# Altium PCB bluienrg.PcbDoc
Units mm, origin at the board's own origin, x right, y up, seen from the top; angles counter-clockwise.
Board outline 21.99 x 29.99 mm, 2 copper layers (Top Layer, Bottom Layer), stack 0.871 mm thick; 61 components, 38 nets, 192 pads, 30 vias.
Unrouted connection lines stored in the file: 96.
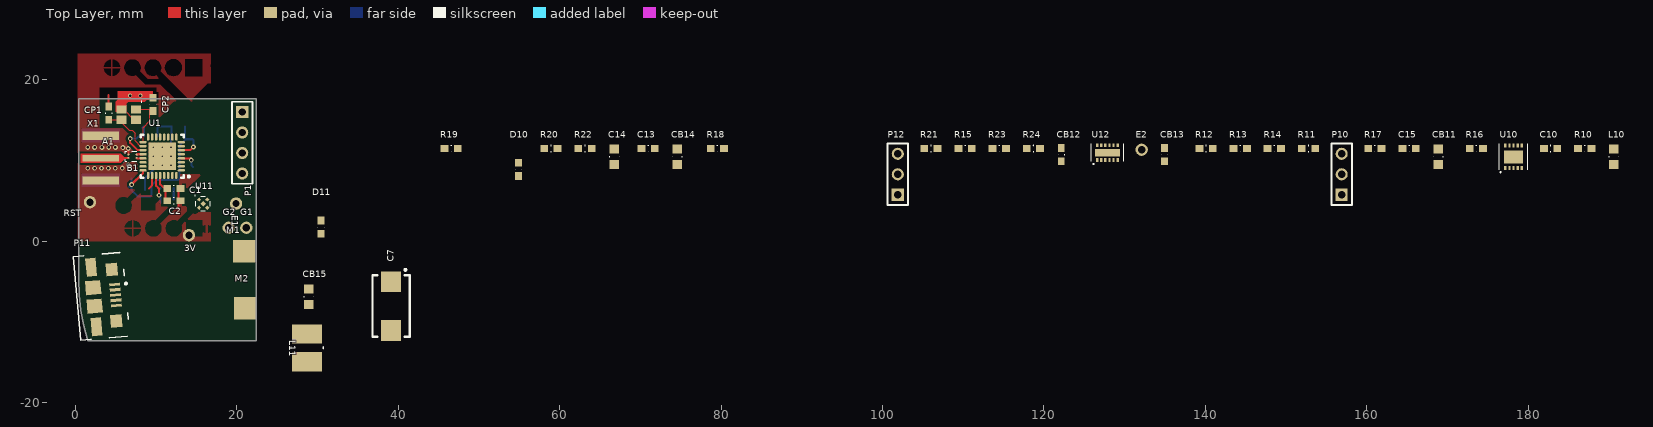
[diagram p0: Top Layer view]
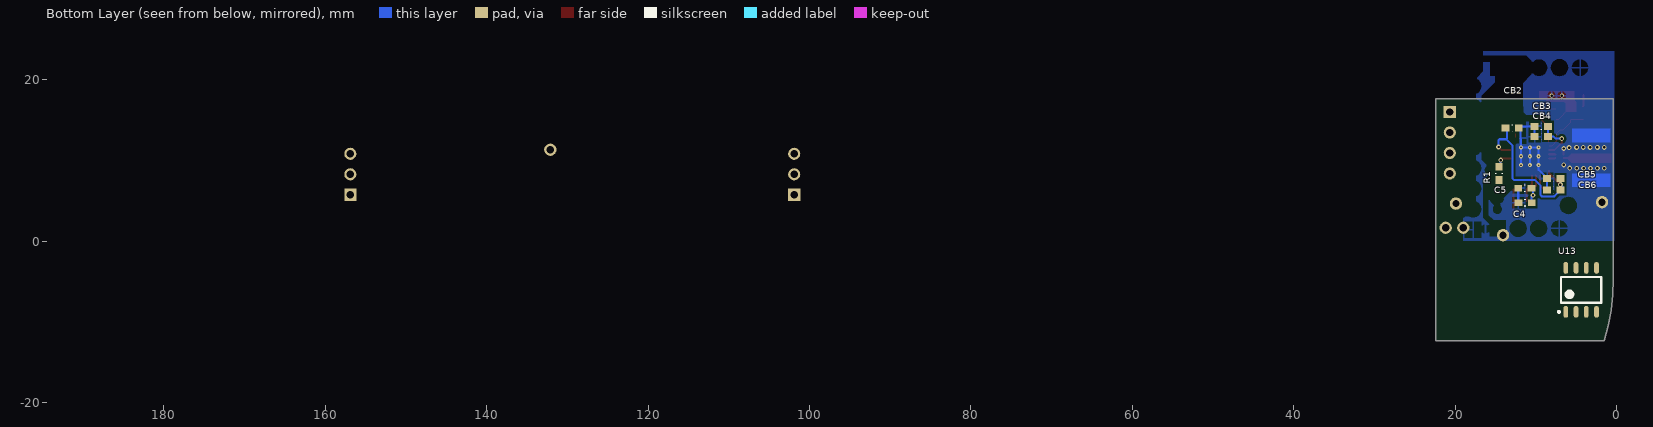
[diagram p1: Bottom Layer view, seen from below]

## Layer stack, top to bottom
Top Solder: solder mask 0.0102, Solder Resist, Dk 3.5
Top Layer: signal copper 0.0356
Dielectric 1: core 0.8, FR-4, Dk 4.31
Bottom Layer: signal copper 0.0356
Bottom Solder: solder mask 0.0102, Solder Resist, Dk 3.5

## Board outline
0.385,17.667 0.385,-4.744 0.456,-6.664 0.668,-8.573 1.021,-10.461 1.513,-12.319 22.37,-12.319 22.37,17.667

## Design rules (kind name [scope] priority, off if disabled: settings)
Clearance Clearance_5 [HasFootprint('BALF-NRG') vs InPolygonClass('All Polygons')] p1: gap=0.5 ignorepadtopadclearanceinfootprint=FALSE
Clearance Clearance_6 [InNet('NetA1_ANT') vs InPolygonClass('All Polygons')] p2: gap=0.3 ignorepadtopadclearanceinfootprint=FALSE
Clearance Clearance_7 [InNetClass('HC') vs InPolygonClass('All Polygons')] p3: gap=0.5 ignorepadtopadclearanceinfootprint=FALSE
Clearance Clearance_9 [All vs InPolygonClass('All Polygons')] p4: gap=0.3 ignorepadtopadclearanceinfootprint=FALSE
Clearance Clearance_1 [InNet('NetA1_ANT')] p5: gap=0.1 ignorepadtopadclearanceinfootprint=FALSE
Clearance [InNetClass('RFB')] p6: gap=0.1 ignorepadtopadclearanceinfootprint=FALSE
Clearance Clearance_4 [HasFootprint('BALF-NRG')] p7: gap=0.2 ignorepadtopadclearanceinfootprint=FALSE
Clearance Clearance_3 [HasFootprint('MSOP-8')] p8: gap=0.2 ignorepadtopadclearanceinfootprint=FALSE
Clearance Clearance_2 [HasFootprint('BLUENRG-1')] p9: gap=0.15 ignorepadtopadclearanceinfootprint=FALSE
Clearance Clearance_8 [All] p10: gap=0.2 ignorepadtopadclearanceinfootprint=FALSE
MaxMinImpedance [InNetClass('AN')] p1: minimum=45.00 maximum=55.00
MinimumSolderMaskSliver MinimumSolderMaskSliver_2 [HasFootprint('BALF-NRG')] p1: minsoldermaskwidth=0.02
MinimumSolderMaskSliver [HasFootprint('16MHZ_25_20')] p2: minsoldermaskwidth=0.12
MinimumSolderMaskSliver MinimumSolderMaskSliver_1 [All] p3: minsoldermaskwidth=0.2
PolygonConnect PolygonConnect_1 [HasFootprint('BlueNRG-1')] p1: connectstyle=Direct reliefconductorwidth=0.254 reliefentries=4 polygonreliefangle="90 Angle" airgapwidth=0.254
PolygonConnect PolygonConnect_4 [HasFootprint('sma')] p2: connectstyle=Direct reliefconductorwidth=0.254 reliefentries=4 polygonreliefangle="90 Angle" airgapwidth=0.254
PolygonConnect PolygonConnect_3 [IsShieldingVia] p3: connectstyle=Direct reliefconductorwidth=0.254 reliefentries=4 polygonreliefangle="90 Angle" airgapwidth=0.254
PolygonConnect PolygonConnect_2 [IsStitchingVia] p4: connectstyle=Direct reliefconductorwidth=0.254 reliefentries=4 polygonreliefangle="90 Angle" airgapwidth=0.254
PolygonConnect [All] p5: connectstyle=Relief reliefconductorwidth=0.254 reliefentries=4 polygonreliefangle="90 Angle" airgapwidth=0.254
RoutingCorners [InNetClass('AN')] p1: cornerstyle=Round minsetback=2.54 maxsetback=2.54
RoutingCorners RoutingCorners_1 [All] p2: cornerstyle=45-Degree minsetback=2.54 maxsetback=2.54
RoutingVias [All] p1: holewidth=0.3 width=0.6 viastyle="Through Hole" minholewidth=0.3 minwidth=0.6 maxholewidth=0.3 maxwidth=0.6
SMDNeckDown [InNet('NetA1_ANT')] p1: percent=600.000
SignalStimulus [All] p1: kind=1 level=0 starttime=10.00n stoptime=60.00n periodtime=100.00n
SilkToSolderMaskClearance SilkToSolderMaskClearance_1 [HasFootprint('MY_0603')] p1: minsilkscreentomaskgap=0.1 clearancetoexposedcopper=TRUE
SilkToSolderMaskClearance SilkToSolderMaskClearance_2 [HasFootprint('MY_0805')] p2: minsilkscreentomaskgap=0.1 clearancetoexposedcopper=TRUE
SilkToSolderMaskClearance [IsPad] p3: minsilkscreentomaskgap=0.254 clearancetoexposedcopper=TRUE
SolderMaskExpansion [All] p1: expansion=0.102
SupplyNets SupplyNets_1 [InNet('VCC')] p1: voltage=3.000
SupplyNets [InNet('12V')] p2: voltage=12.00
Width [InNet('NetA1_ANT')] p1: maxlimit=1.706 minlimit=-0.044 preferedwidth=1.243 toplayer_minwidth=0.037 bottomlayer_maxwidth=-0.042 bottomlayer_prefwidth=-0.043 impedancedriven=TRUE minimp=40.000000 maximp=140.000000 favimp=50.000000
Width Width_2 [InNetClass('HC')] p2: maxlimit=0.8 minlimit=0.15 preferedwidth=0.8
Width Width_1 [All] p3: maxlimit=0.8 minlimit=0.15 preferedwidth=0.254
27 further rules are at their usual default settings.

## Classes and differential pairs
net class RFB: NetB1_RF0 NetB1_RF1
net class AN: NetA1_ANT
net class HC: 5V NetM1_1 NetM2_1

## Components (designator, comment, footprint, x,y, rotation, side; value= is the part's Value field where it differs from the comment)
3V "ENC" MY_PAD 14.046,0.737 r0 top
A1 "ANTENNA" sma 3.124,10.281 r270 top
B1 "BALF-NRG" BALF-NRG 7.555,10.719 r180 top
C1 "100p C0G" MY_0603 12.175,6.5 r180 top value=100pF
C2 "100n" MY_0603 12.175,5 r180 top value=100pF
C4 "100n" MY_0603 11.325,4.75 r180 bottom value=100pF
C5 "1u" MY_0603 11.34,6.553 r180 bottom value=100pF
C7 "100uF" 100uf_tant 39.091,-8.052 r270 top
C10 "100n" MY_0603 182.79,11.455 r0 top value=100pF
C13 "1u" MY_0603 70.954,11.455 r0 top value=100pF
C14 "10u" MY_0805 66.763,10.465 r90 top value=100pF
C15 "100nF" MY_0603 165.264,11.455 r0 top value=100pF
CB2 "100n" MY_0603 12.916,13.995 r0 bottom value=100pF
CB3 "1u" MY_0603 9.308,14.224 r180 bottom value=100pF
CB4 "100n" MY_0603 9.308,12.954 r180 bottom value=100pF
CB5 "1u" MY_0603 7.759,7.772 r180 bottom value=100pF
CB6 "100n" MY_0603 7.759,6.325 r180 bottom value=100pF
CB11 "10u" MY_0805 168.871,10.465 r90 top value=100pF
CB12 "100n" MY_0603 122.16,10.719 r90 top value=100pF
CB13 "100n" MY_0603 134.962,10.719 r90 top value=100pF
CB14 "10uF" MY_0805 74.561,10.465 r90 top value=100pF
CB15 "10uF" MY_0805 28.905,-6.883 r90 top value=100pF
CP1 "13pF C0G" MY_0603 4.115,15.865 r270 top value=100pF
CP2 "13pF C0G" MY_0603 9.601,16.954 r270 top value=100pF
D10 "LED2" MY_0603 54.901,8.89 r90 top
D11 "LED2" MY_0603 30.429,1.727 r90 top
E1 "ENC" MY_PAD 19.888,4.648 r0 top
E2 "ENC" MY_PAD 132.117,11.328 r0 top
G1 "ENC" MY_PAD 21.158,1.651 r0 top
G2 "ENC" MY_PAD 18.974,1.651 r0 top
L10 "Inductor" MY_0805 190.639,10.465 r90 top value=10nH
L11 "Inductor" IND_4_4 28.677,-13.233 r270 top value=2.2uH
M1 "M1" MPAD 20.904,-1.27 r0 top
M2 "M2" MPAD 21.057,-8.306 r0 top
P1 "DBG" HDR1X4 20.65,16.002 r270 top
P10 "SWD" HDR1X3 156.907,5.74 r90 top
P11 "USBmicroAB" 1981584 0.864,-7.036 r185 top
P12 "BAT" HDR1X3 101.891,5.74 r90 top
R1 "4.7k" MY_0603 14.54,8.382 r90 bottom value=4.7K
R10 "4.7k" MY_0603 187.032,11.455 r0 top value=4.7K
R11 "100k" MY_0603 152.793,11.455 r0 top value=4.7K
R12 "100k" MY_0603 140.093,11.455 r0 top value=4.7K
R13 "0R" MY_0603 144.334,11.455 r0 top value=4.7K
R14 "0R" MY_0603 148.551,11.455 r0 top value=4.7K
R15 "0R" MY_0603 110.248,11.455 r0 top value=4.7K
R16 "100R" MY_0603 173.595,11.455 r0 top value=4.7K
R17 "4.7k" MY_0603 161.022,11.455 r0 top value=4.7K
R18 "4.7k" MY_0603 79.539,11.455 r0 top value=4.7K
R19 "4.7k" MY_0603 46.544,11.455 r0 top value=4.7K
R20 "2.2k" MY_0603 58.914,11.455 r0 top value=4.7K
R21 "4.7k" MY_0603 106.006,11.455 r0 top value=4.7K
R22 "56k" MY_0603 63.131,11.455 r0 top value=4.7K
R23 "51k" MY_0603 114.464,11.455 r0 top value=4.7K
R24 "51k" MY_0603 118.706,11.455 r0 top value=4.7K
RST "M1" MY_PAD 1.778,4.826 r0 top
U1 "BlueNRG-1" BlueNRG-1 10.73,10.516 r180 top
U10 "MAX8815A" PDQN10 177.202,9.042 r0 top
U11 "RT9078" RT9078 15.799,4.648 r0 top
U12 "DRV8839DSSR" DRV8839 126.631,10.058 r0 top
U13 "TP4056" MY_SOIC8N 4.369,-6.045 r90 bottom
X1 "16MHZ" 16MHZ_25_20 6.578,15.687 r180 top

## Footprints (in the part's own frame and the unit in brackets; to place one, negate y for a bottom-side part, rotate by r counter-clockwise, add the part's x,y. Pads: shape width x height; smd on the part's side, far side on the other; paste and mask are expansions set on the pad)
16MHZ_25_20 [mm] "DFN, 4-Leads, Body 2.00x2.50mm, Pitch 1.70mm, IPC Medium Density"
  rect 1.2x1 smd mask+0.08: G1(0.9,-0.65) G2(-0.9,0.65) XT1(-0.9,-0.65) XT2(0.9,0.65)
  silkscreen extent -1.65,-1.65 -1.55,-1.55, body extent -1.3,-1.05 1.3,1.05, height 0.5
100uf_tant [mm]
  rect 2.55x2.45 smd: +(-3.025,0) -(3.025,0)
  silkscreen extent -4.62,-2.3 3.8,2.3, body extent -3.8,-2.3 3.8,2.3, height 2.8
1981584 [mm] "Connector; USB2.0, Type B, SM; 5 Position; Right Angle"
  rect 1.35x0.4 smd: 1(-4.1,-1.3) 2(-4.1,-0.65) 3(-4.1,0) 4(-4.1,0.65) 5(-4.1,1.3)
  rect 1.4x1.6 smd: 6(-3.9,3.2) 8(-3.9,-3.2)
  rect 1.3x2.3 smd: 7(-1.4,3.7) 9(-1.4,-3.7)
  rect 1.9x1.8 smd: 10(-1.4,1.15) 11(-1.4,-1.15)
  silkscreen extent -5.62,-5.2 0.7,5.2, body extent -5.2,-5 0.6,4.95, height 3.9
BALF-NRG [mm]
  round 0.22 smd paste+0.1 mask+0.1: AN(1,0.4) G(1,0) RF0(0,0.4) RF1(0,0)
  silkscreen extent 0,-0.4 1.61,1
BlueNRG-1 [mm] "QFN, 32-Leads, Body 5.00x5.00mm, Pitch 0.50mm, Thermal Pad 3.45x3.45mm, IPC Medium Density"
  oval 0.9x0.3 smd: 1(-2.375,1.75) 2(-2.375,1.25) 3(-2.375,0.75) 4(-2.375,0.25) 5(-2.375,-0.25) 6(-2.375,-0.75) 7(-2.375,-1.25) 8(-2.375,-1.75) 17(2.375,-1.75) 18(2.375,-1.25) 19(2.375,-0.75) 20(2.375,-0.25) 21(2.375,0.25) 22(2.375,0.75) 23(2.375,1.25) 24(2.375,1.75)
  oval 0.3x0.9 smd: 9(-1.75,-2.375) 10(-1.25,-2.375) 11(-0.75,-2.375) 12(-0.25,-2.375) 13(0.25,-2.375) 14(0.75,-2.375) 15(1.25,-2.375) 16(1.75,-2.375) 25(1.75,2.375) 26(1.25,2.375) 27(0.75,2.375) 28(0.25,2.375) 29(-0.25,2.375) 30(-0.75,2.375) 31(-1.25,2.375) 32(-1.75,2.375)
  rect 3.45x3.45 smd: 33(0,0)
  silkscreen extent -3.42,-2.65 2.65,2.65, body extent -2.5,-2.5 2.5,2.5, height 0.8
DRV8839 [mm]
  rect 0.3x0.45 smd: EN1(1.5,1.8) EN2(2.5,1.8) G1(2,0) G2(2.5,0) IN1(1,1.8) IN2(2,1.8) nSLEEP(0.5,1.8) OUT1(1,0) OUT2(1.5,0) VCC(0,1.8) VM1(0,0) VM2(0.5,0)
  rect 3.1x0.95 smd: PG(1.25,0.9)
  silkscreen extent -0.75,-0.51 3.25,2
HDR1X3 [mm] "Connector; Header; 3 Position"
  rect 1.5x1.5 hole 0.9: 1(0,0)
  round 1.5 hole 0.9: 2(2.54,0) 3(5.08,0)
  silkscreen extent -1.27,-1.27 6.35,1.27
HDR1X4 [mm] "Connector; Header; 4 Position"
  rect 1.5x1.5 hole 0.9: 1(0,0)
  round 1.5 hole 0.9: 2(2.54,0) 3(5.08,0) 4(7.62,0)
  silkscreen extent -1.27,-1.27 8.89,1.27
IND_4_4 [mm]
  rect 2.4x3.7 smd: 1(-1.725,0) 2(1.725,0)
  silkscreen extent -0.13,-2 0.12,2, body extent -2.27,-2 2.27,2, height 2.5
MPAD [mm]
  rect 2.8x2.8 smd: 1(0,0)
MY_0603 [mm] "0603 without silkscreen issues"
  rect 0.965x0.85 smd: 1(-0.825,0) 2(0.825,0)
  silkscreen extent -0.01,-0.41 0.01,0.41, body extent -0.8,-0.4 0.8,0.4, height 3
MY_0805 [mm] "0805 without silkscreen issues"
  rect 1.14x1.2 smd: 1(-0.955,0) 2(0.955,0)
  silkscreen extent -0.01,-0.61 0.01,0.61, body extent -1,-0.6 1,0.6, height 4
MY_PAD [mil]
  round 60 hole 35.43: 1(0,0)
MY_SOIC8N [mm]
  oval 1.45x0.6 smd: 1(-2.725,1.905) 2(-2.725,0.635) 3(-2.725,-0.635) 4(-2.725,-1.905) 5(2.725,-1.905) 6(2.725,-0.635) 7(2.725,0.635) 8(2.725,1.905)
  silkscreen extent -2.85,-2.5 1.6,2.88, body extent -2,-2.5 2,2.5, height 2.65
PDQN10 [mm]
  rect 0.3x0.5 smd: 1(0,0) 2(0.5,0) 3(1,0) 4(1.5,0) 5(2,0) 6(2,2.8) 7(1.5,2.8) 8(1,2.8) 9(0.5,2.8) 10(0,2.8)
  rect 2.4x1.6 smd: 11(1,1.4)
  silkscreen extent -0.77,-0.51 2.77,3
RT9078 [mm] "DFN, 4-Leads, Body 1.00x1.00mm, Pitch 0.63mm, IPC Medium Density"
  rect 0.4x0.4 smd rot 45: EN(0.5,-0.5) GND(-0.5,-0.5) VIN(0.5,0.5) VOUT(-0.5,0.5)
  rect 0.5x0.5 smd rot 45: SGND(0,0)
  silkscreen extent -1.05,-0.9 0.9,1.05, body extent -0.5,-0.5 0.5,0.5, height 0.45
sma [mm]
  rect 0.82x4.56 smd: ANT(0,0)
  rect 1x4.56 smd: G1(-2.775,0) G2(2.775,0)
  Bottom Layer region: -3.65,-2.4 -1.95,-2.4 -1.95,2.4 -3.65,2.4
  Bottom Layer region: 1.9,-2.4 3.6,-2.4 3.6,2.4 1.9,2.4

## Part data
3V E1 E2 G1 G2 M1 M2 RST: library part Socket, "Socket", LatestRevisionDate=17-Jul-2002, LatestRevisionNote="Re-released for DXP Platform.", Publisher="Altium Limited"
C1 C2 C4 C5 C10 C13 C14 C15 CB2 CB3 CB4 CB5 CB6 CB11 CB12 CB13 CB14 CB15 CP1 CP2: library part "Cap Semi", "Capacitor (Semiconductor SIM Model)", LatestRevisionDate=29-May-2009, LatestRevisionNote="IPC-7351 Footprint Added.", PackageDescription="Chip Capacitor", PackageReference=C1206, Published=8-Jun-2000, Publisher="Altium Limited"
C7: library part C_TANT
D10 D11: "Typical RED, GREEN, YELLOW, AMBER GaAs LED", LatestRevisionDate=17-Jul-2002, LatestRevisionNote="Re-released for DXP Platform.", PackageDescription="SM LED; 2 Flat Leads", PackageReference=3.2X1.6X1.1, PackageVersion=Feb-2002, Published=8-Jun-2000, Publisher="Altium Limited"
P1: library part "Header 4", "Header, 4-Pin", LatestRevisionDate=17-Jul-2002, LatestRevisionNote="Re-released for DXP Platform.", Publisher="Altium Limited"
P10 P12: library part "Header 3", "Header, 3-Pin", LatestRevisionDate=17-Jul-2002, LatestRevisionNote="Re-released for DXP Platform.", Publisher="Altium Limited"
R1 R10 R11 R12 R13 R14 R15 R16 R17 R18 R19 R20 R21 R22 R23 R24: library part Res3, "Resistor", LatestRevisionDate=29-May-2009, LatestRevisionNote="IPC-7351 Footprint Added.", PackageDescription="Chip Resistor", PackageReference=J1-0603, Published=8-Jun-2000, Publisher="Altium Limited"
X1: library part XTAL_4PIN
L10 L11: Code_IEC=1005, Code_JEITA=0402, LatestRevisionDate=29-May-2009, LatestRevisionNote="IPC-7351 Footprint Added.", PackageDescription="Chip Inductor", PackageReference=0402-A, Published=8-Jun-2000, Publisher="Altium Limited"

## Via types
v1: diameter 0.6, hole 0.3, Top Layer to Bottom Layer, tented both sides, 19 vias
v2: diameter 0.5, hole 0.2, Top Layer to Bottom Layer, 9 vias
v3: diameter 0.5, hole 0.3, Top Layer to Bottom Layer, tented both sides, 2 vias

## Nets (pads, with @x,y where several pads share a name; then routed paths per layer and width w, separated by ;. In a path a pad name is that pad's centre, name@x,y a point inside that pad or via, vN(x,y) a via of type N, cw(c..) or ccw(c..) an arc to the next point about the centre after c; other vN are vias at no path point)
5V: C7.+ CB11.2 CB12.2 R16.1 U10.6 U10.9 U10.10
BL_ENTER: P1.1 R1.2 U1.4 | length 2.3
  Top Layer w0.254: U1.4 13.109,10.262 14.261,10.262 14.337,10.185 v1(14.337,10.033)
  Bottom Layer w0.254: v1(14.337,10.033) 14.337,9.41 R1.2
BL_RXD: P1.3 U1.32
BL_TXD: P1.2 U1.3
CHR: R23.2 R24.1 U1.16
E1: E1.1 R11.1 U1.30
E2: E2.1 R12.1 U1.29
EN: R17.2 U1.5 U10.4
GND: A1.G1 A1.G2 B1.G C1.1 C2.1 C4.1 C5.1 C7.- C10.1 C13.1 C14.1 C15.1 CB2.1 CB3.1 CB4.1 CB5.1 CB6.1 CB11.1 CB12.1 CB13.2 CB14.1 CB15.1 CP1.1 CP2.1 G1.1 G2.1 P1.4 P10.3 P11.5 P11.6 P11.7 P11.8 P11.9 P11.10 P11.11 P12.3 R1.1 R14.1 R17.1 R20.2 R22.2 R24.2 U1.33 U10.5 U10.11 U11.GND U11.SGND U13.3 X1.G1 X1.G2 | length 26.6
  Top Layer w0.15: X1.G1 5.944,16.337 6.574,15.706 ; 6.607,15.643 7.213,15.037 X1.G2
  Top Layer w0.254: 4.052,18.1 4.052,16.753 CP1.1 ; 5.728,18.073 5.791,18.01 ; B1.G 6.555,11.204 v1@6.579,11.227 ; 12.737,3.556 12.775,3.594 C1.1@12.775,6.401
  Bottom Layer w0.254: CB6.1 CB5.1 9.63,8.819 v2(9.63,9.416) v2(9.63,10.516) v2(9.63,11.616) v2(10.73,11.616) ; CB4.1 CB3.1 11.861,14.224 11.887,14.199 11.887,12.725 11.83,12.669 v2(11.83,11.616) ; v2(10.73,9.416) v2(10.73,10.516) v2(10.73,11.616) ; v2(11.83,9.416) v2(11.83,10.516) v2(11.83,11.616) ; C5.1 12.165,5.182 C4.1@12.19,5.156 ; v2(10.73,11.616) v2(11.83,11.616)
  other v1: 1.506,9.026 2.36,9.026 3.214,9.026 4.068,9.026 4.922,9.026 5.791,9.042 6.528,9.449 6.528,11.481 5.867,11.582 1.499,11.608 2.362,11.608 3.251,11.608 4.115,11.608 4.928,11.608
  other v3: 6.768,18.034 8.038,18.034
IN1: U1.9
IN2: U1.10
MEN: U1.7 | length 0
  Top Layer w0.15: U1.7 U1.7@13.109,11.769
NetA1_ANT: A1.ANT B1.AN | length 3.5
  Top Layer w0.254: A1.ANT@3.073,10.319 B1.AN
NetB1_RF0: B1.RF0 U1.21 | length 0.8
  Top Layer w0.254: B1.RF0 7.609,10.266 U1.21
NetB1_RF1: B1.RF1 U1.20 | length 0.8
  Top Layer w0.254: B1.RF1 7.602,10.766 U1.20
NetC1_2: C1.2 C2.2 U1.28 | length 3.5
  Top Layer w0.254: U1.28 10.48,7.045 11.167,6.358 11.167,4.995 C2.2@11.125,4.953
NetC4_2: C4.2 C5.2 L10.2 U1.27 | length 4.5
  Top Layer w0.254: U1.27 9.986,8.135 9.986,6.84 10.338,6.489 v1(10.338,5.69)
  Bottom Layer w0.254: C4.2 10.5,5.527 v1(10.338,5.69) 10.338,6.376 C5.2
NetC15_2: C15.2 R16.2 U10.7
NetCB14_2: CB14.2 D10.1 D11.1 P11.1 R21.1 R23.1 U13.4 U13.8
NetCP1_2: CP1.2 U1.18 X1.XT2 | length 6.3
  Top Layer w0.15: CP1.2 4.117,15.037 X1.XT2 5.678,14.703 6.665,13.717 7.021,13.717 7.383,13.355 7.383,12.408 8.025,11.766 U1.18
NetCP2_2: CP2.2 U1.17 X1.XT1 | length 6.2
  Top Layer w0.15: X1.XT1@7.478,16.36 9.22,16.36 9.22,14.898 8.355,14.033 U1.17
NetD10_2: D10.2 R18.2
NetD11_2: D11.2 R19.2
NetL10_1: L10.1 U1.26 | length 1.8
  Top Layer w0.254: 9.105,6.543 9.48,6.919 U1.26
NetL11_2: L11.2 U10.1 U10.2
NetM1_1: M1.1
NetM2_1: M2.1
NetP12_2: P12.2 R21.2 R22.1 U13.1
NetR13_2: R13.2 R14.2 U10.8
NetR18_1: R18.1 U13.7
NetR19_1: R19.1 U13.6
NetR20_1: R20.1 U13.2
RESETN: C10.2 R10.1 RST.1 U1.25
SWDTCK: P10.2 U1.2
SWDTIO: P10.1 U1.1
VBAT: 3V.1 C13.2 CB15.2 L11.1 P12.1 R13.1 R15.2 U10.3 U11.EN U11.VIN U13.5
VCC: C14.2 CB2.2 CB3.2 CB4.2 CB5.2 CB6.2 R10.2 R11.2 R12.2 R15.1 U1.6 U1.15 U1.19 U1.24 U11.VOUT | length 28.6
  Top Layer w0.254: v1(6.768,12.7) 6.768,12.192 7.694,11.266 U1.19 ; v1(6.934,7.01) 8.355,8.432 U1.24 ; U1.6 14.198,11.266 v1(14.591,11.659)
  Bottom Layer w0.254: CB6.2@6.603,6.68 v1(6.934,7.01) ; v1(6.768,12.7) 7.53,12.7 7.784,12.954 CB4.2 CB3.2 CB3.2@8.292,14.033 ; CB5.2 v1(6.934,7.01) ; CB2.2@13.537,14.199 13.537,12.725 13.638,12.624 ; v1(14.591,11.659) 14.591,11.546 14.609,11.529 14.609,12.505 14.49,12.624 13.638,12.624 ; v1(6.934,7.01) CB6.2 7.702,5.556 7.678,5.533 9.218,5.533 9.433,5.748 9.433,6.898 10.13,7.595 12.706,7.595 12.889,7.778 12.889,11.875 13.638,12.624
VDD: CB13.1
pads on no net: P11.2 P11.3 P11.4 U1.8 U1.11 U1.12 U1.13 U1.14 U1.22 U1.23 U1.31 U12.EN1 U12.EN2 U12.G1 U12.G2 U12.IN1 U12.IN2 U12.nSLEEP U12.OUT1 U12.OUT2 U12.PG U12.VCC U12.VM1 U12.VM2
copper on no net: | length 0.4
  Top Layer w0.15: 12.48,12.891 12.48,13.282

## Polygon pours and split planes (outlines as drawn)
GND on Bottom Layer "Top Layer-No Net" (solid, remove dead copper, pour order 22): 0.25,0.025 0.25,23.525 16.5,23.525 16.5,21.025 16.5,3.025 18.75,3.025 18.96,2.815 18.96,0.025
GND on Top Layer "Top Layer-GND" (solid, remove dead copper, pour order 26): 0.25,0 0.25,23.25 16.75,23.25 16.75,0

## Other copper
Top Layer:
  pour cut-out: 2.958,19.05 10.07,19.05 10.07,15.494 8.546,13.97 2.958,13.97
  region net GND: 5.244,18.542 9.562,18.542 9.562,17.526 8.8,17.526 8.546,17.272 6.514,17.272 6.26,17.018 6.26,16.002 4.99,16.002 4.99,17.272 5.244,17.526
  region net NetA1_ANT: 6.067,10.332 5.567,10.832 0.667,10.832 0.667,9.732 5.567,9.732 6.067,10.232

## Text inside footprints (layer, text, board x,y; h text height)
P11: Mechanical 1 "PCB Edge" at 0.081,-3.052 h0.25 r275